# Altium PCB FROGSBORO.PcbDoc (part 1 of 3)
Units mm, origin at the board's own origin, x right, y up, seen from the top; angles counter-clockwise.
Board outline 36.5 x 67 mm, 6 copper layers (Top Layer, GND, SIGV, SIGH, Power, Bottom Layer), stack 1.197 mm thick; 116 components, 83 nets, 599 pads, 359 vias.
Unrouted connection lines stored in the file: 50.
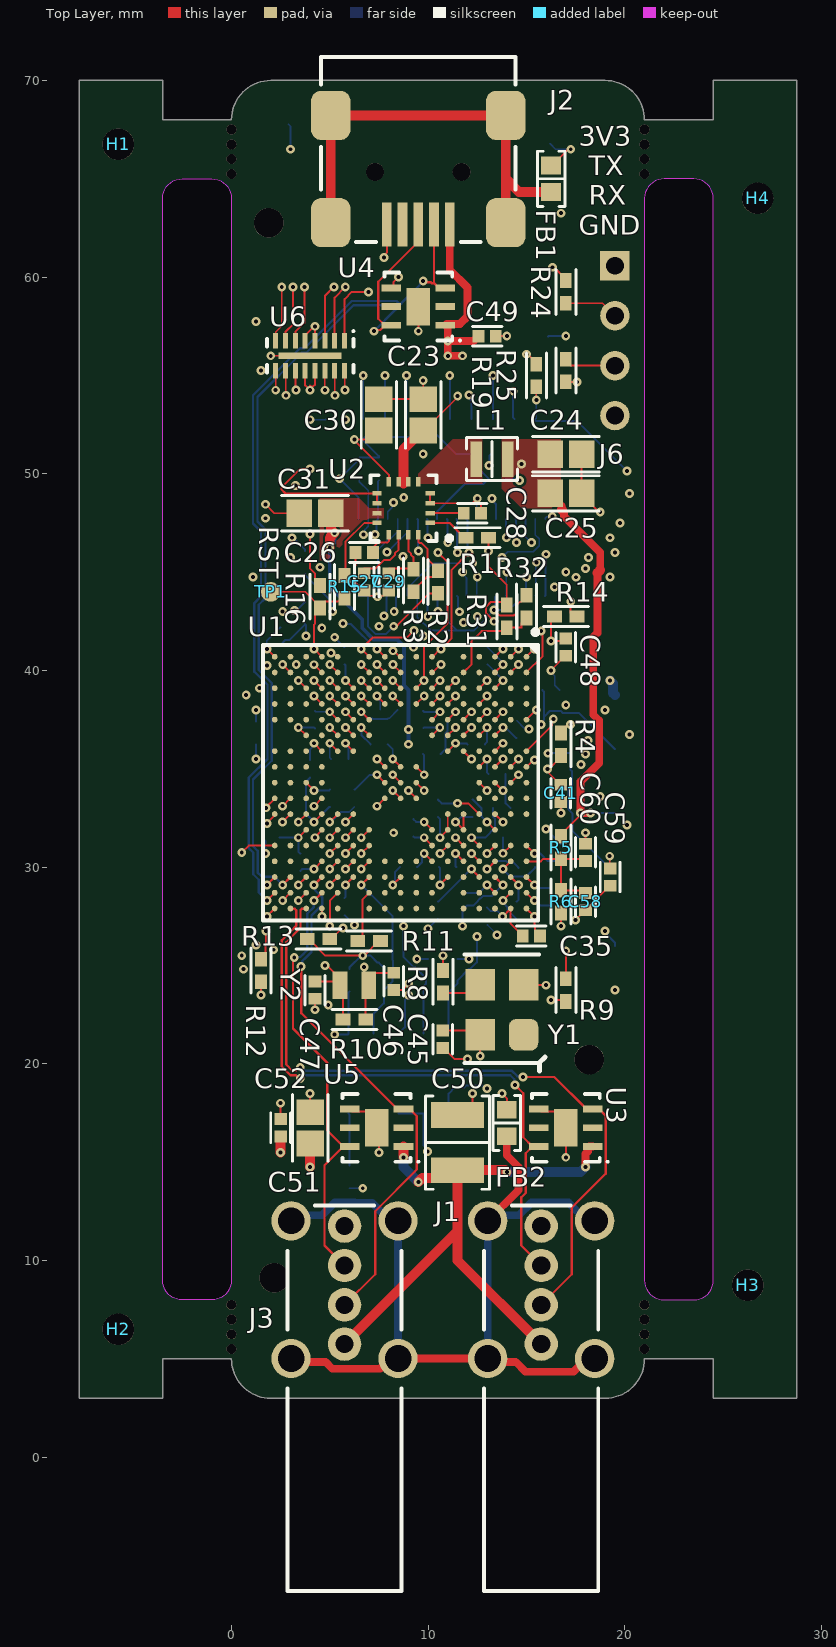
[diagram p0: Top Layer view]
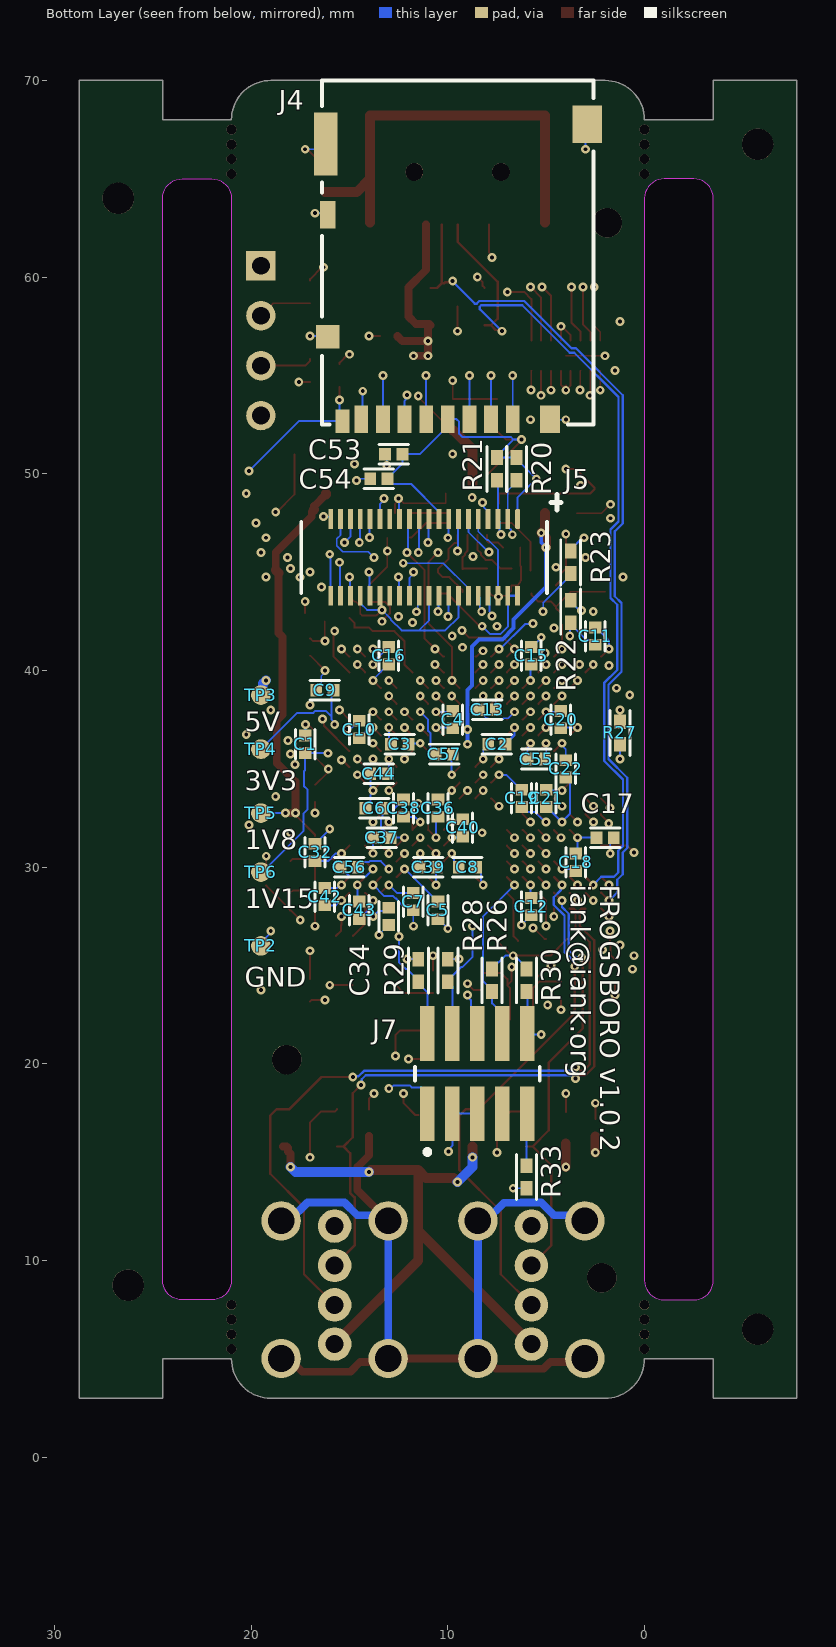
[diagram p1: Bottom Layer view, seen from below]
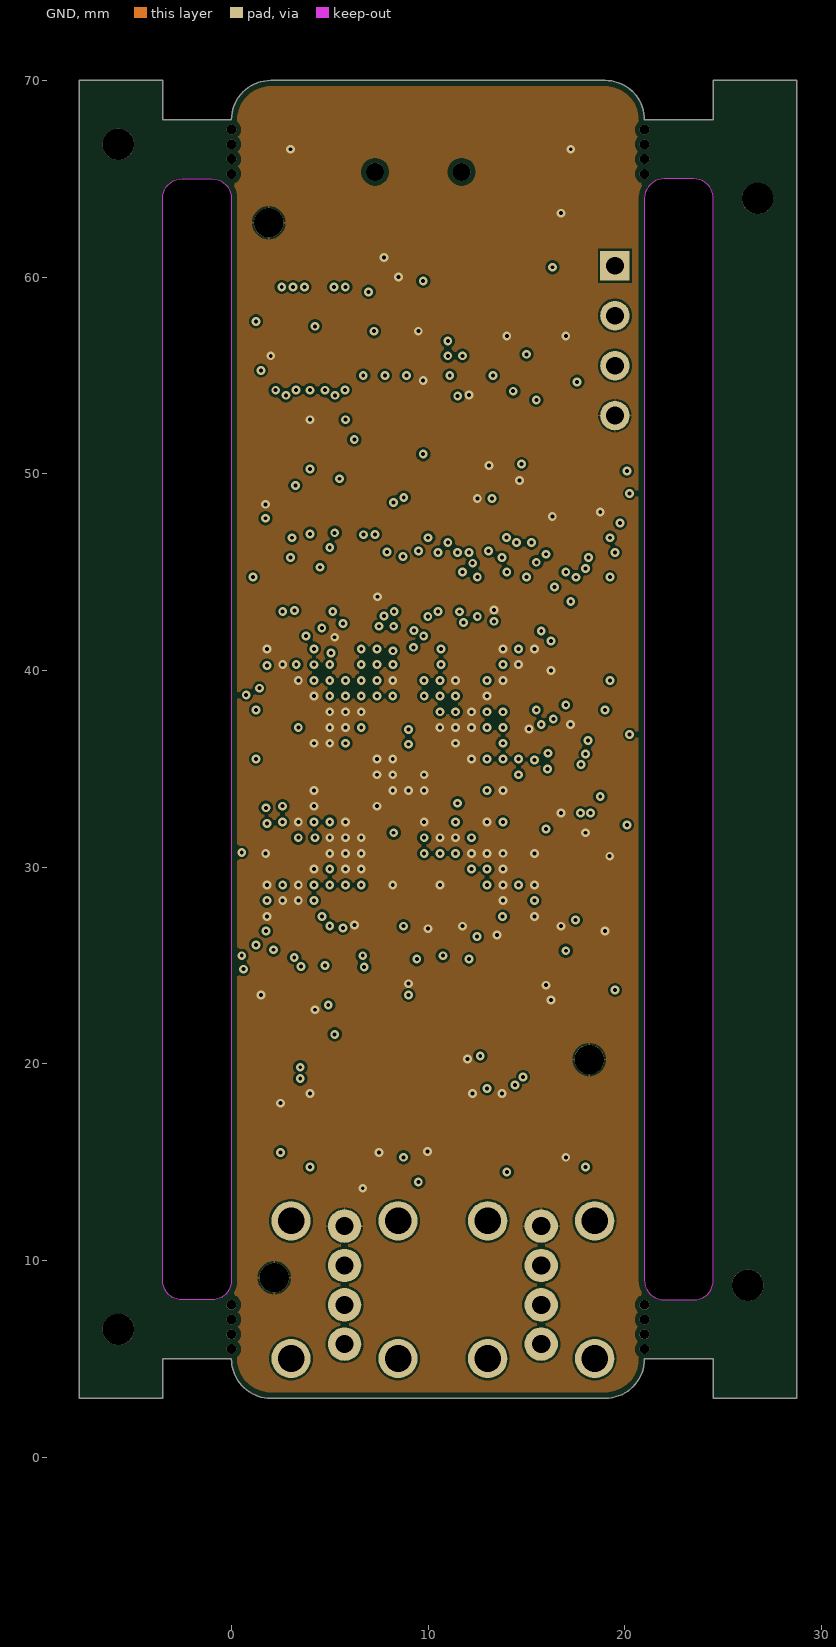
[diagram p2: GND]
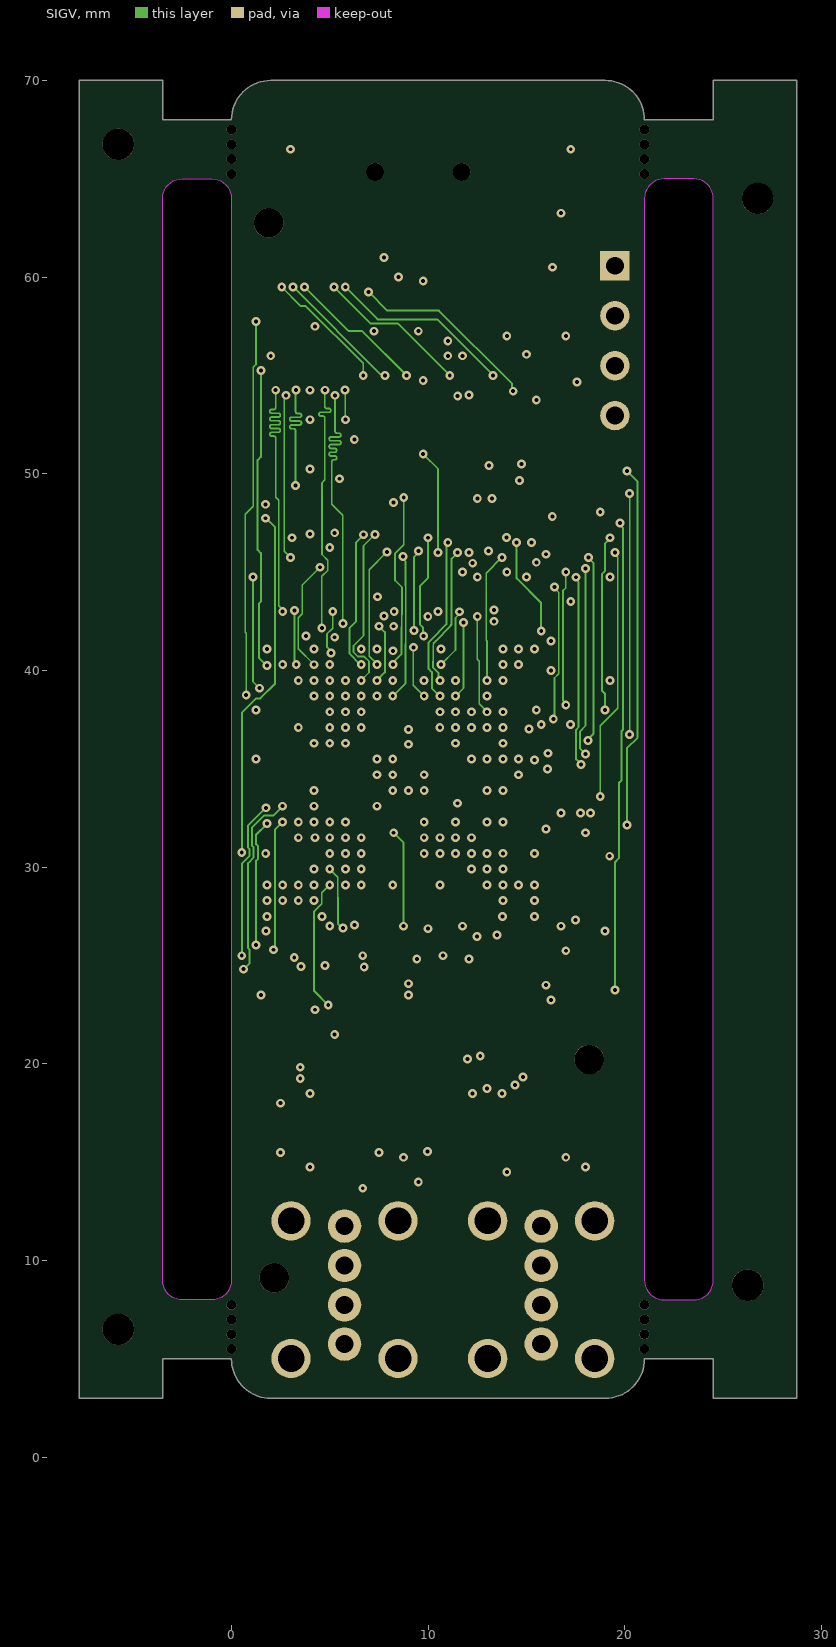
[diagram p3: SIGV]
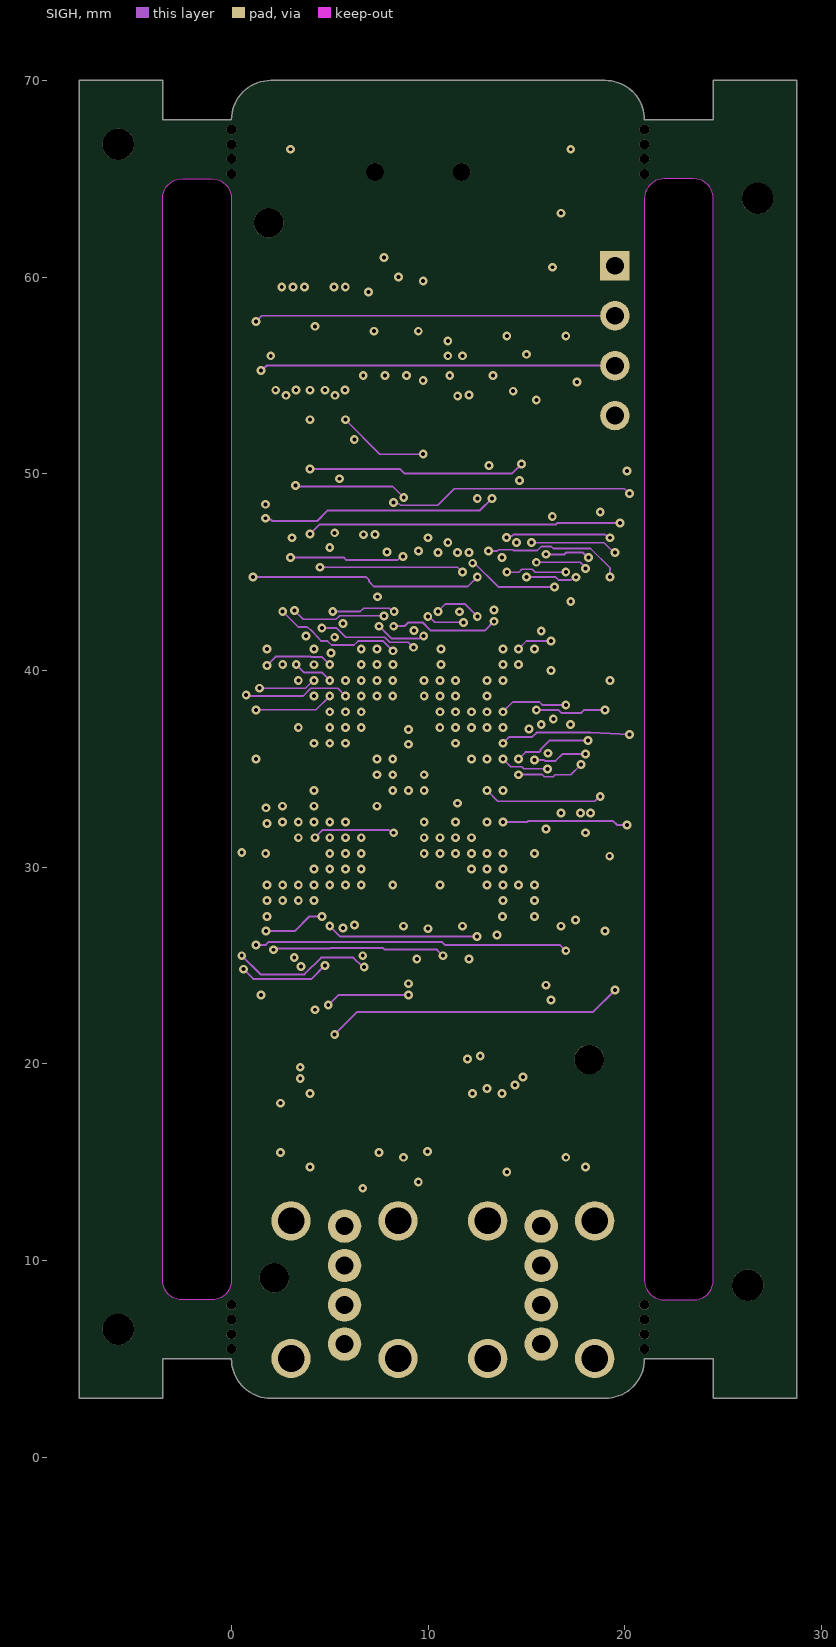
[diagram p4: SIGH]
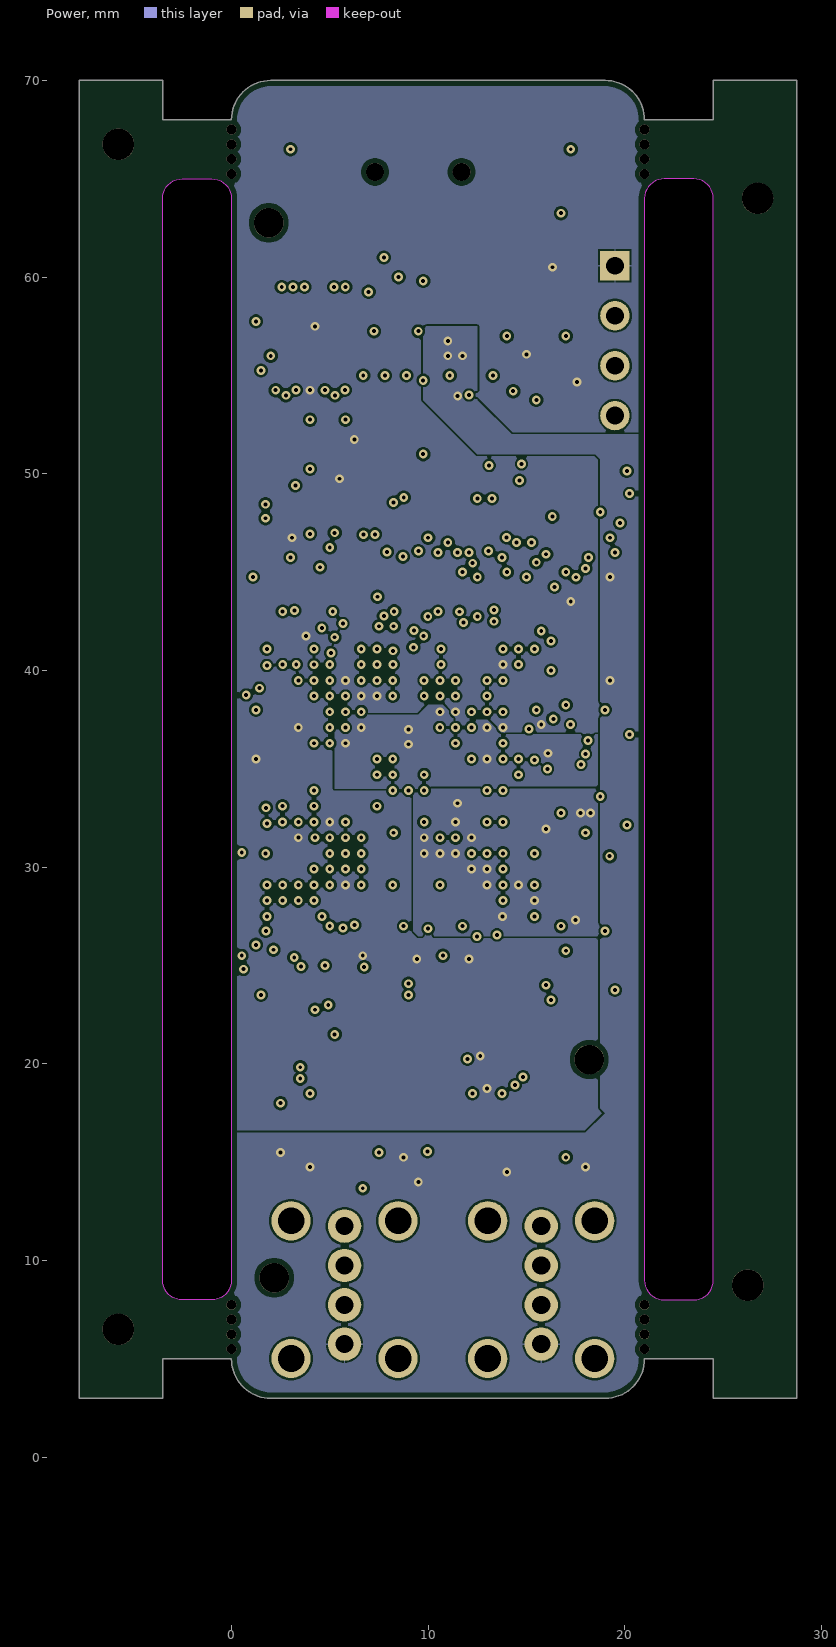
[diagram p5: Power]

## Layer stack, top to bottom
Top Solder: solder mask 0.0127, Solder Resist, Dk 3.8
Top Layer: signal copper 0.035
Dielectric 1: prepreg 0.1, 2313, Dk 4.05
GND: signal copper 0.0175
Core 1: core 0.365, FR-4, Dk 4.5
SIGV: signal copper 0.0175
Dielectric 2: prepreg 0.127, 2116, Dk 4.25
SIGH: signal copper 0.0175
Core 2: core 0.365, FR-4, Dk 4.5
Power: signal copper 0.0175
Dielectric 3: prepreg 0.1, 2313, Dk 4.05
Bottom Layer: signal copper 0.035
Bottom Solder: solder mask 0.0127, Solder Resist, Dk 3.8

## Board outline
-7.75,3 -3.5,3 -3.5,5 0,5 ccw(c2,5) 2,3 19,3 ccw(c19,5) 21,5 24.5,5 24.5,3 28.75,3 28.75,70 24.5,70 24.5,68 21,68 ccw(c19,68) 19,70 2,70 ccw(c2,68) 0,68 -3.5,68 -3.5,70 -7.75,70
cut-out: 21,9 ccw(c22,9) 22,8 23.5,8 ccw(c23.5,9) 24.5,9 24.5,64 ccw(c23.5,64) 23.5,65 22,65 ccw(c22,64) 21,64
cut-out: -3.5,9 -3.5,64 cw(c-2.5,64) -2.5,65 -1,65 cw(c-1,64) 0,64 0,9 cw(c-1,9) -1,8 -2.5,8 cw(c-2.5,9)

## Design rules (kind name [scope] priority, off if disabled: settings)
BoardOutlineClearance [All] p1: gap=0.3 ignorepadtopadclearanceinfootprint=FALSE
Clearance [All] p1: gap=0.105 ignorepadtopadclearanceinfootprint=FALSE except(0.089: Arc-Text Track-Text SMDPad-Text THPad-Text Fill-Text Poly-Text Region-Text Text-Text; 0.127: Arc-Via Track-Via SMDPad-Via THPad-Via Via-Via Via-Fill Via-Poly Via-Region Via-Text; 0.25: Arc-Hole Track-Hole SMDPad-Hole THPad-Hole Via-Hole Fill-Hole Poly-Hole Region-Hole Text-Hole)
ComponentClearance [All] p1: gap=0.089 collisioncheckmode=3 verticalgap=0.089 showdistances=TRUE
DiffPairsRouting DiffPairsRouting_USB [InDifferentialPairClass('DIFF90')] p1: maxlimit=0.254 minlimit=0.105 mostfreqgap=0.105 toplayer_minwidth=0.117 toplayer_maxwidth=0.381 toplayer_prefwidth=0.117 midlayer1_minwidth=0.117 midlayer1_maxwidth=0.381 midlayer1_prefwidth=0.117 midlayer2_minwidth=0.117 midlayer2_maxwidth=0.381 midlayer2_prefwidth=0.147 midlayer3_minwidth=0.117 midlayer3_maxwidth=0.381 midlayer3_prefwidth=0.117 midlayer4_minwidth=0.117 midlayer4_maxwidth=0.381 midlayer4_prefwidth=0.117 bottomlayer_minwidth=0.117 bottomlayer_maxwidth=0.381 bottomlayer_prefwidth=0.117 maxuncoupledlength=12.7
DiffPairsRouting [All] p2: maxlimit=0.089 minlimit=0.089 mostfreqgap=0.089 toplayer_minwidth=0.089 toplayer_maxwidth=1816.048 toplayer_prefwidth=0.089 midlayer1_minwidth=0.089 midlayer1_maxwidth=1816.048 midlayer1_prefwidth=0.089 midlayer2_minwidth=0.089 midlayer2_maxwidth=1816.048 midlayer2_prefwidth=0.089 midlayer3_minwidth=0.089 midlayer3_maxwidth=1816.048 midlayer3_prefwidth=0.089 midlayer4_minwidth=0.089 midlayer4_maxwidth=1816.048 midlayer4_prefwidth=0.089 bottomlayer_minwidth=0.089 bottomlayer_maxwidth=1816.048 bottomlayer_prefwidth=0.089 maxuncoupledlength=12.7
Height [All] p1: minheight=0 maxheight=1816.048 prefheight=12.7
HoleSize [All] p1: absolutevalues=TRUE maxlimit=6.3 minlimit=0.2 maxpercent=80.000 minpercent=20.000
HoleToHoleClearance [All] p1: gap=0.25 allowstackedmicrovias=FALSE
MatchedLengths MatchLengths_xSignals_U1_J4 [InxSignalClass('xSignals_U1_J4_MatchLengthsClass')] p1: tolerance=2.54 checknetsindiffpair=FALSE checkdiffpairvsdiffpair=TRUE checkxsignals=TRUE checkothers=TRUE
MatchedLengths MatchLengths_SDIO_U1_J4 [InxSignalClass('SDIO_U1_J4_MatchLengths')] p2: tolerance=2.54 checknetsindiffpair=FALSE checkdiffpairvsdiffpair=TRUE checkxsignals=TRUE checkothers=TRUE
MatchedLengths "Schematic Matched Net Lengths_10" [InNet('NetU1_J1')] p3: tolerance=0.25 checknetsindiffpair=FALSE checkdiffpairvsdiffpair=TRUE checkxsignals=TRUE checkothers=TRUE
MatchedLengths "Schematic Matched Net Lengths_9" [InNet('NetU1_J4')] p4: tolerance=0.25 checknetsindiffpair=FALSE checkdiffpairvsdiffpair=TRUE checkxsignals=TRUE checkothers=TRUE
MatchedLengths "Schematic Matched Net Lengths_8" [InNet('NetU1_K1')] p5: tolerance=0.25 checknetsindiffpair=FALSE checkdiffpairvsdiffpair=TRUE checkxsignals=TRUE checkothers=TRUE
MatchedLengths "Schematic Matched Net Lengths_7" [InNet('NetU1_H3')] p6: tolerance=0.25 checknetsindiffpair=FALSE checkdiffpairvsdiffpair=TRUE checkxsignals=TRUE checkothers=TRUE
MatchedLengths "Schematic Matched Net Lengths_6" [InNet('NetU1_H4')] p7: tolerance=0.25 checknetsindiffpair=FALSE checkdiffpairvsdiffpair=TRUE checkxsignals=TRUE checkothers=TRUE
MatchedLengths "Schematic Matched Net Lengths_5" [InNet('NetU1_J2')] p8: tolerance=0.25 checknetsindiffpair=FALSE checkdiffpairvsdiffpair=TRUE checkxsignals=TRUE checkothers=TRUE
MinimumAnnularRing [All] p1: minimumring=0.076
MinimumSolderMaskSliver [All] p1: minsoldermaskwidth=0
PlaneClearance [All] p1: clearance=0.089
PlaneConnect PlaneConnectPowerPads [InPadClass('PowerPads')] p1: planeconnectstyle=Direct reliefexpansion=0.508 reliefentries=4 reliefconductorwidth=0.254 reliefairgap=0.254
PlaneConnect [All] p2: pad.planeconnectstyle=Relief pad.reliefexpansion=0.3 pad.reliefentries=4 pad.reliefconductorwidth=0.089 pad.reliefairgap=0.089 via.planeconnectstyle=Direct via.reliefexpansion=0.3 via.reliefentries=4 via.reliefconductorwidth=0.127 via.reliefairgap=0.127
PolygonConnect PolygonConnectPowerPads [All vs (InPadClass('PowerPads'))] p1: connectstyle=Direct reliefconductorwidth=0.254 reliefentries=4 polygonreliefangle="90 Angle" airgapwidth=0.254
PolygonConnect [All] p2: thpad.connectstyle=Relief thpad.reliefconductorwidth=0.089 thpad.reliefentries=4 thpad.polygonreliefangle="90 Angle" thpad.airgapwidth=0.089 smdpad.connectstyle=Direct smdpad.reliefconductorwidth=0.089 smdpad.reliefentries=4 smdpad.polygonreliefangle="90 Angle" smdpad.airgapwidth=0.089 via.connectstyle=Direct via.reliefconductorwidth=0.127 via.reliefentries=4 via.polygonreliefangle="90 Angle" via.airgapwidth=0.127
RoutingVias [All] p1: holewidth=0.2 width=0.45 viastyle="Through Hole" minholewidth=0.2 minwidth=0.45 maxholewidth=6.3 maxwidth=6.55
SilkToSilkClearance [All] p1: silktosilkclearance=0
SilkToSolderMaskClearance [IsPad] p1: minsilkscreentomaskgap=0.089 clearancetoexposedcopper=TRUE
SolderMaskExpansion [All] p1: expansion=0.075 istentingtop=FALSE
Width [All] p1: maxlimit=16 minlimit=0.089 preferedwidth=0.102 midlayer1_prefwidth=0.089 midlayer3_prefwidth=0.089 midlayer4_prefwidth=0.089 minimp=50.000000 maximp=50.000000 favimp=50.000000
20 further rules are at their usual default settings.

## Classes and differential pairs
differential pair class DIFF90: USBA USBB USBC
differential pair USBC: +USBC_P -USBC_N
differential pair USBB: +USBB_P -USBB_N
differential pair USBA: +USBA_P -USBA_N

## Components (designator, comment, footprint, x,y, rotation, side; value= is the part's Value field where it differs from the comment)
C1 "4.7µF" "CAP 0402_1005" 17.25,36.25 r270 bottom
C2 "0.1µF" "CAP 0402_1005" 7.5,36.25 r0 bottom
C3 "0.1µF" "CAP 0402_1005" 12.44,36.25 r180 bottom
C4 "0.1µF" "CAP 0402_1005" 9.75,37.5 r270 bottom
C5 "4.7µF" "CAP 0402_1005" 10.5,27.81 r90 bottom
C6 "0.1µF" "CAP 0402_1005" 13.75,33 r0 bottom
C7 "0.1µF" "CAP 0402_1005" 11.75,28.25 r270 bottom
C8 "0.1µF" "CAP 0402_1005" 9,30 r180 bottom
C9 "4.7µF" "CAP 0402_1005" 16.25,39 r180 bottom
C10 "0.1µF" "CAP 0402_1005" 14.5,37 r90 bottom
C11 "4.7µF" "CAP 0402_1005" 2.5,41.75 r270 bottom
C12 "0.1µF" "CAP 0402_1005" 5.75,28 r270 bottom
C13 "0.1µF" "CAP 0402_1005" 8,38 r0 bottom
C15 "0.1µF" "CAP 0402_1005" 5.75,40.75 r90 bottom
C16 "0.1µF" "CAP 0402_1005" 13,40.75 r270 bottom
C17 "4.7µF" "CAP 0402_1005" 2,31.5 r0 bottom
C18 "0.1µF" "CAP 0402_1005" 3.5,30.25 r270 bottom
C19 "0.1µF" "CAP 0402_1005" 6.25,33.5 r90 bottom
C20 "0.1µF" "CAP 0402_1005" 4.25,37.5 r90 bottom
C21 "0.1µF" "CAP 0402_1005" 5,33.5 r90 bottom
C22 "2.2µF" "CAP 0402_1005" 4,35 r90 bottom
C23 "10µF" "CAP 0805_2012" 9.75,53 r270 top
C24 "10µF" "CAP 0805_2012" 17,51 r180 top
C25 "10µF" "CAP 0805_2012" 17,49 r180 top
C26 "10nF" "CAP 0402_1005" 6.75,46 r0 top
C27 "0.1µF" "CAP 0402_1005" 6.75,44.5 r90 top
C28 "0.1µF" "CAP 0402_1005" 12.25,48 r180 top
C29 "0.1µF" "CAP 0402_1005" 8,44.5 r90 top
C30 "10µF" "CAP 0805_2012" 7.5,53 r270 top
C31 "10µF" "CAP 0805_2012" 4.25,48 r0 top
C32 "4.7µF" "CAP 0402_1005" 16.75,30.75 r90 bottom
C34 "0.1µF" "CAP 0402_1005" 13,27.5 r270 bottom
C35 "0.1µF" "CAP 0402_1005" 15.25,26.5 r0 top
C36 "0.1µF" "CAP 0402_1005" 10.5,33 r270 bottom
C37 "0.1µF" "CAP 0402_1005" 13.36,31.5 r0 bottom
C38 "0.1µF" "CAP 0402_1005" 12.25,33 r90 bottom
C39 "0.1µF" "CAP 0402_1005" 11,30 r180 bottom
C40 "0.1µF" "CAP 0402_1005" 9.25,32 r90 bottom
C41 "22pF" "CAP 0402_1005" 16.75,33.75 r90 top
C42 "0.1µF" "CAP 0402_1005" 16.25,28.5 r90 bottom
C43 "0.1µF" "CAP 0402_1005" 14.5,27.81 r270 bottom
C44 "0.1µF" "CAP 0402_1005" 13.5,34.75 r0 bottom
C45 "0.1µF" "CAP 0402_1005" 10.75,21.25 r270 top
C46 "20pF" "CAP 0402_1005" 8.25,24.19 r90 top
C47 "20pF" "CAP 0402_1005" 4.25,23.75 r90 top
C48 "1µF" "CAP 0402_1005" 17,41.19 r90 top
C49 "20pF" "CAP 0402_1005" 13,57 r180 top
C50 "100µF" "CAP 1210_3225 - 2.8MM" 11.5,16 r270 top
C51 "10µF" "CAP 0805_2012" 4,16.75 r270 top
C52 "0.1µF" "CAP 0402_1005" 2.5,16.75 r90 top
C53 "0.1µF" "CAP 0402_1005" 12.75,51 r0 bottom
C54 "4.7µF" "CAP 0402_1005" 13.5,49.75 r180 bottom
C55 "0.1µF" "CAP 0402_1005" 5.5,35.5 r180 bottom
C56 "0.1µF" "CAP 0402_1005" 15,30 r0 bottom
C57 "0.1µF" "CAP 0402_1005" 10.19,35.75 r180 bottom
C58 "0.1µF" "CAP 0402_1005" 18,28.25 r90 top
C59 "4.7µF" "CAP 0402_1005" 19.25,29.5 r270 top
C60 "0.1µF" "CAP 0402_1005" 18,30.75 r90 top
FB1 "180R" "FER 0603_1608" 16.25,65 r270 top
FB2 "180R" "FER 0603_1608" 14,17 r270 top
H1 "Stencil_Alignment" Stencil_Alignment -5.75,66.75 r0 top
H2 "Stencil_Alignment" Stencil_Alignment -5.75,6.5 r0 top
H3 "Stencil_Alignment" Stencil_Alignment 26.25,8.75 r0 top
H4 "Stencil_Alignment" Stencil_Alignment 26.75,64 r0 top
J1 "73725-0110BLF" "AMPHENOL USB 73725-0110BLF" 15.75,3 r0 top
J2 "10033526-N3212LF" "FCI USB 10033526-N3212LF" 9.5,66.5 r0 top
J3 "73725-0110BLF" "AMPHENOL USB 73725-0110BLF" 5.75,3 r0 top
J4 "DM3BT-DSF-PEJS" "HIROSE DM3BT-DSF-PEJS" 9.5,60.5 r0 bottom
J5 "DF23C-40DP-0.5V(92)" DF23C-40DP-0.5V(92) 11.25,45.75 r270 bottom
J6 "Header 4" HDR1X4 19.5,60.58 r270 top
J7 "FTSH-105-01-L-DV-K" SMTC-FTSH-105-01-L-DV-K_V 8.5,19.5 r180 bottom
L1 "2.2µH" "IND 0806_2016" 13.25,50.75 r0 top
R1 "100k" "RES 0402_1005" 12.5,46.75 r0 top
R2 "100k" "RES 0402_1005" 10.5,44.5 r270 top
R3 "22k" "RES 0402_1005" 9.25,44.575 r270 top
R4 "20k 1%" "RES 0402_1005" 16.75,36.25 r270 top
R5 "4.7k 1%" "RES 0402_1005" 16.75,31 r90 top
R6 "4.7k 1%" "RES 0402_1005" 16.75,28.25 r90 top
R8 "51R" "RES 0402_1005" 10.75,24.175 r90 top
R9 "0R" "RES 0402_1005" 17,23.75 r90 top
R10 "1M" "RES 0402_1005" 6.25,22.25 r0 top
R11 "100k" "RES 0402_1005" 7,26.25 r0 top
R12 "5.62k 1%" "RES 0402_1005" 1.5,24.75 r270 top
R13 "0R" "RES 0402_1005" 4.428,26.351 r0 top
R14 "51R" "RES 0402_1005" 17,42.75 r0 top
R15 "51R" "RES 0402_1005" 5.75,44.25 r270 top
R16 "51R" "RES 0402_1005" 4.5,43.75 r270 top
R19 "100k" "RES 0402_1005" 15.5,55 r90 top
R20 "2.2k" "RES 0402_1005" 6.5,50.25 r90 bottom
R21 "2.2k" "RES 0402_1005" 7.5,50.25 r90 bottom
R22 "100k" "RES 0402_1005" 3.75,43 r270 bottom
R23 "100k" "RES 0402_1005" 3.75,45.5 r90 bottom
R24 "100k" "RES 0402_1005" 17,59.25 r90 top
R25 "100k" "RES 0402_1005" 17,55.25 r270 top
R26 "100k" "RES 0402_1005" 7.75,24.25 r90 bottom
R27 "100k" "RES 0402_1005" 1.25,36.825 r270 bottom
R28 "100k" "RES 0402_1005" 10,24.75 r90 bottom
R29 "100k" "RES 0402_1005" 11.5,24.75 r90 bottom
R30 "100k" "RES 0402_1005" 6,24.25 r90 bottom
R31 "15k" "RES 0402_1005" 14,42.75 r270 top
R32 "22k" "RES 0402_1005" 15,43.25 r270 top
R33 "0R" "RES 0402_1005" 6,14.25 r270 bottom
TP1 "Testpoint" Testpoint 2,44 r0 top
TP2 "Testpoint" Testpoint 19.5,26 r180 bottom
TP3 "Testpoint" Testpoint 19.5,38.75 r180 bottom
TP4 "Testpoint" Testpoint 19.5,36 r180 bottom
TP5 "Testpoint" Testpoint 19.5,32.75 r180 bottom
TP6 "Testpoint" Testpoint 19.5,29.75 r180 bottom
U1 "SAM9X60D1G-I/4FB" BGA233C80P17X17_1400X1400X120 8.6,34.3 r270 top
U2 "MIC2800-G8SYML" QFN50P300X300X90-16N 8.75,48.25 r180 top
U3 "TPD2E001DRSR" SON95P300X80_HS-7N 17,16.75 r180 top
U4 "TPD2E001DRSR" SON95P300X80_HS-7N 9.5,58.5 r180 top
U5 "TPD2E001DRSR" SON95P300X80_HS-7N 7.38,16.75 r180 top
U6 "ECLAMP2410PQTCT" SON50P160X65_HS-17N 4,56 r270 top
Y1 "DSC1001BI5-024.0000T" DSC1001BI5 13.75,22.75 r180 top
Y2 "ABS06-32.768KHZ-T" ABRA-ABS06-2_V 6.25,24 r0 top

## Footprints (in the part's own frame and the unit in brackets; to place one, negate y for a bottom-side part, rotate by r counter-clockwise, add the part's x,y. Pads: shape width x height; smd on the part's side, far side on the other; paste and mask are expansions set on the pad)
ABRA-ABS06-2_V [mm] "SMD, 2-Leads, Body 2x1.2mm"
  rect 0.75x1.4 smd: 1(-0.725,0) 2(0.725,0)
  body extent -1,-0.6 1,0.6, height 0.6
"AMPHENOL USB 73725-0110BLF" [mm] "USB2.0 TYPEA 4 Pin Pitch 2mm"
  round 1.7 hole 0.92: 1(0,2.75) 2(0,4.75) 3(0,6.75) 4(0,8.75)
  round 2 hole 1.35: S(-2.72,2.02) S(-2.72,9.02) S(2.72,2.02) S(2.72,9.02)
  silkscreen extent -2.9,-9.8 2.9,9.8, body extent -3.56,-9.85 3.56,9.85, height 14.53
BGA233C80P17X17_1400X1400X120 [mm] "BGA, 233-Leads, Body 14.00x14.00mmx1.20mm, Pitch 0.80mm"
  round 0.29 smd: A1(-6.4,6.4) A2(-5.6,6.4) A3(-4.8,6.4) A4(-4,6.4) A5(-3.2,6.4) A7(-1.6,6.4) A8(-0.8,6.4) A9(0,6.4) A10(0.8,6.4) A11(1.6,6.4) A13(3.2,6.4) A14(4,6.4) A15(4.8,6.4) A16(5.6,6.4) A17(6.4,6.4) B1(-6.4,5.6) B2(-5.6,5.6) B3(-4.8,5.6) B4(-4,5.6) B5(-3.2,5.6) B7(-1.6,5.6) B8(-0.8,5.6) B9(0,5.6) B10(0.8,5.6) B11(1.6,5.6) B13(3.2,5.6) B14(4,5.6) B15(4.8,5.6) B16(5.6,5.6) B17(6.4,5.6) C1(-6.4,4.8) C2(-5.6,4.8) C3(-4.8,4.8) C4(-4,4.8) C5(-3.2,4.8) C6(-2.4,4.8) C7(-1.6,4.8) C8(-0.8,4.8) C9(0,4.8) C10(0.8,4.8) C11(1.6,4.8) C12(2.4,4.8) C13(3.2,4.8) C14(4,4.8) C15(4.8,4.8) C16(5.6,4.8) C17(6.4,4.8) D1(-6.4,4) D2(-5.6,4) D3(-4.8,4) D4(-4,4) D5(-3.2,4) D6(-2.4,4) D7(-1.6,4) D8(-0.8,4) D9(0,4) D10(0.8,4) D11(1.6,4) D12(2.4,4) D13(3.2,4) D14(4,4) D15(4.8,4) D16(5.6,4) D17(6.4,4) E1(-6.4,3.2) E2(-5.6,3.2) E3(-4.8,3.2) E4(-4,3.2) E5(-3.2,3.2) E6(-2.4,3.2) E7(-1.6,3.2) E11(1.6,3.2) E12(2.4,3.2) E13(3.2,3.2) E14(4,3.2) E15(4.8,3.2) E16(5.6,3.2) E17(6.4,3.2) F3(-4.8,2.4) F4(-4,2.4) F5(-3.2,2.4) F6(-2.4,2.4) F7(-1.6,2.4) F11(1.6,2.4) F12(2.4,2.4) F13(3.2,2.4) F14(4,2.4) F15(4.8,2.4) G1(-6.4,1.6) G2(-5.6,1.6) G3(-4.8,1.6) G4(-4,1.6) G5(-3.2,1.6) G6(-2.4,1.6) G12(2.4,1.6) G13(3.2,1.6) G14(4,1.6) G15(4.8,1.6) G16(5.6,1.6) G17(6.4,1.6) H1(-6.4,0.8) H2(-5.6,0.8) H3(-4.8,0.8) H4(-4,0.8) H8(-0.8,0.8) H9(0,0.8) H10(0.8,0.8) H14(4,0.8) H15(4.8,0.8) H16(5.6,0.8) H17(6.4,0.8) J1(-6.4,0) J2(-5.6,0) J3(-4.8,0) J4(-4,0) J8(-0.8,0) J9(0,0) J10(0.8,0) J14(4,0) J15(4.8,0) J16(5.6,0) J17(6.4,0) K1(-6.4,-0.8) K2(-5.6,-0.8) K3(-4.8,-0.8) K4(-4,-0.8) K8(-0.8,-0.8) K9(0,-0.8) K10(0.8,-0.8) K14(4,-0.8) K15(4.8,-0.8) K16(5.6,-0.8) K17(6.4,-0.8) L1(-6.4,-1.6) L2(-5.6,-1.6) L3(-4.8,-1.6) L4(-4,-1.6) L5(-3.2,-1.6) L6(-2.4,-1.6) L12(2.4,-1.6) L13(3.2,-1.6) L14(4,-1.6) L15(4.8,-1.6) L16(5.6,-1.6) L17(6.4,-1.6) M3(-4.8,-2.4) M4(-4,-2.4) M5(-3.2,-2.4) M6(-2.4,-2.4) M7(-1.6,-2.4) M11(1.6,-2.4) M12(2.4,-2.4) M13(3.2,-2.4) M14(4,-2.4) M15(4.8,-2.4) N1(-6.4,-3.2) N2(-5.6,-3.2) N3(-4.8,-3.2) N4(-4,-3.2) N5(-3.2,-3.2) N6(-2.4,-3.2) N7(-1.6,-3.2) N11(1.6,-3.2) N12(2.4,-3.2) N13(3.2,-3.2) N14(4,-3.2) N15(4.8,-3.2) N16(5.6,-3.2) N17(6.4,-3.2) P1(-6.4,-4) P2(-5.6,-4) P3(-4.8,-4) P4(-4,-4) P5(-3.2,-4) P6(-2.4,-4) P7(-1.6,-4) P8(-0.8,-4) P9(0,-4) P10(0.8,-4) P11(1.6,-4) P12(2.4,-4) P13(3.2,-4) P14(4,-4) P15(4.8,-4) P16(5.6,-4) P17(6.4,-4) R1(-6.4,-4.8) R2(-5.6,-4.8) R3(-4.8,-4.8) R4(-4,-4.8) R5(-3.2,-4.8) R6(-2.4,-4.8) R7(-1.6,-4.8) R8(-0.8,-4.8) R9(0,-4.8) R10(0.8,-4.8) R11(1.6,-4.8) R12(2.4,-4.8) R13(3.2,-4.8) R14(4,-4.8) R15(4.8,-4.8) R16(5.6,-4.8) R17(6.4,-4.8) T1(-6.4,-5.6) T2(-5.6,-5.6) T3(-4.8,-5.6) T4(-4,-5.6) T5(-3.2,-5.6) T7(-1.6,-5.6) T8(-0.8,-5.6) T9(0,-5.6) T10(0.8,-5.6) T11(1.6,-5.6) T13(3.2,-5.6) T14(4,-5.6) T15(4.8,-5.6) T16(5.6,-5.6) T17(6.4,-5.6) U1(-6.4,-6.4) U2(-5.6,-6.4) U3(-4.8,-6.4) U4(-4,-6.4) U5(-3.2,-6.4) U7(-1.6,-6.4) U8(-0.8,-6.4) U9(0,-6.4) U10(0.8,-6.4) U11(1.6,-6.4) U13(3.2,-6.4) U14(4,-6.4) U15(4.8,-6.4) U16(5.6,-6.4) U17(6.4,-6.4)
  silkscreen extent -7.77,-7 7,7, body extent -7,-7 7,7, height 1.2
"CAP 0402_1005" [mm] "Chip Capacitor, 2-Leads, Body 1.02x0.51mm, IPC Medium Density"
  rect 0.6x0.64 smd: 1(-0.44,0) 2(0.44,0)
  silkscreen extent -0.75,-0.5 0.75,0.5, body extent -0.5,-0.26 0.5,0.26, height 0.52
"CAP 0805_2012" [mm] "Chip Capacitor, 2-Leads, Body 2.00x1.20mm, IPC Medium Density"
  rect 1.3x1.4 smd: 1(-0.8,0) 2(0.8,0)
  silkscreen extent -1.7,-0.9 1.7,0.9, body extent -1,-0.64 1,0.64, height 1.26
"CAP 1210_3225 - 2.8MM" [mm] "Chip Capacitor, 2-Leads, Body 3.20x2.50mm, IPC Medium Density"
  rect 1.3x2.7 smd: 1(-1.4,0) 2(1.4,0)
  silkscreen extent -2.37,-1.63 2.37,1.63, body extent -1.6,-1.25 1.6,1.25, height 2.8
DF23C-40DP-0.5V(92) [mm]
  rrect50% 1x0.25 smd: 1(-1.95,4.8)
  rect 1x0.25 smd: 2(1.95,4.8) 3(-1.95,4.3) 4(1.95,4.3) 5(-1.95,3.8) 6(1.95,3.8) 7(-1.95,3.3) 8(1.95,3.3) 9(-1.95,2.8) 10(1.95,2.8) 11(-1.95,2.3) 12(1.95,2.3) 13(-1.95,1.8) 14(1.95,1.8) 15(-1.95,1.3) 16(1.95,1.3) 17(-1.95,0.8) 18(1.95,0.8) 19(-1.95,0.3) 20(1.95,0.3) 21(-1.95,-0.2) 22(1.95,-0.2) 23(-1.95,-0.7) 24(1.95,-0.7) 25(-1.95,-1.2) 26(1.95,-1.2) 27(-1.95,-1.7) 28(1.95,-1.7) 29(-1.95,-2.2) 30(1.95,-2.2) 31(-1.95,-2.7) 32(1.95,-2.7) 33(-1.95,-3.2) 34(1.95,-3.2) 35(-1.95,-3.7) 36(1.95,-3.7) 37(-1.95,-4.2) 38(1.95,-4.2) 39(-1.95,-4.7) 40(1.95,-4.7)
  silkscreen extent -3.2,-6.2 1.8,7, body extent -2.18,-5.7 2.12,5.8, height 1.2
DSC1001BI5 [mm]
  rrect50% 1.5x1.6 smd: 1(-1.1,1.27)
  rect 1.5x1.6 smd: 2(-1.1,-1.27) 3(1.1,-1.27) 4(1.1,1.27)
  silkscreen extent -2.2,-2.8 1.9,3.1, body extent -1.6,-2.55 1.6,2.45, height 0.85
"FCI USB 10033526-N3212LF" [mm] "USB 2.0 Type B Mini"
  rect 0.5x2.25 smd: 1(1.6,-3.826) 2(0.8,-3.826) 3(0,-3.826) 4(-0.8,-3.826) 5(-1.6,-3.826)
  round 0.9 hole 0.9 unplated: M(-2.2,-1.151) M(2.2,-1.151)
  rrect50% 2x2.5 smd: S(-4.45,-3.731) S(-4.45,1.719) S(4.45,-3.731) S(4.45,1.719)
  silkscreen extent -4.95,-4.71 4.95,4.69, body extent -4.95,-4.7 4.95,4.7, height 4.01
"FER 0603_1608" [mm] "Chip Ferrite, 2-Leads, Body 1.60x0.80mm, IPC Medium Density"
  rect 0.9x1 smd: 1(-0.675,0) 2(0.675,0)
  silkscreen extent -1.4,-0.7 1.4,0.7, body extent -0.8,-0.41 0.8,0.41, height 0.82
HDR1X4 [mm] "Connector; Header; 4 Position"
  rect 1.5x1.5 hole 0.9: 1(0,0)
  round 1.5 hole 0.9: 2(2.54,0) 3(5.08,0) 4(7.62,0)
"HIROSE DM3BT-DSF-PEJS" [mm]
  rect 0.7x1.4 smd: 1(-2.8,7.725) 2(-1.7,7.725) 3(-0.6,7.725) 4(0.5,7.725) 5(1.6,7.725) 6(2.7,7.725) 7(3.8,7.725) 8(4.9,7.725)
  rect 0.7x1.2 smd: 9(5.85,7.825)
  rect 0.8x1.4 smd: 10(6.6,-2.675)
  rect 1.5x1.9 smd: S(-6.6,-7.275)
  rect 1x1.4 smd: S(-4.7,7.725)
  rect 1.2x1.2 smd: S(6.6,3.525)
  rect 1.2x3.2 smd: S(6.7,-6.275)
  silkscreen extent -6.9,-9.5 6.9,8, body extent -6.92,-9.55 6.93,8, height 1.83
"IND 0806_2016" [mm] "Chip Capacitor, 2-Leads, Body 2.00x1.20mm, IPC Medium Density"
  rect 0.6x1.8 smd: 1(-0.8,0) 2(0.8,0)
  silkscreen extent -1.3,-1.1 1.3,1.1, body extent -1.01,-0.91 1.01,0.91, height 1.81
QFN50P300X300X90-16N [mm] "QFN, 16-Leads, Body 3.00x3.00mm, Pitch 0.50mm, IPC Medium Density"
  rect 0.48x0.23 smd: 1(-1.35,0.75) 2(-1.35,0.25) 3(-1.35,-0.25) 4(-1.35,-0.75) 9(1.35,-0.75) 10(1.35,-0.25) 11(1.35,0.25) 12(1.35,0.75)
  rect 0.23x0.48 smd: 5(-0.75,-1.35) 6(-0.25,-1.35) 7(0.25,-1.35) 8(0.75,-1.35) 13(0.75,1.35) 14(0.25,1.35) 15(-0.25,1.35) 16(-0.75,1.35)
  silkscreen extent -2.45,-1.68 1.68,1.68, body extent -1.58,-1.58 1.58,1.58, height 0.9
"RES 0402_1005" [mm] "Chip Resistor, 2-Leads, Body 1.0x0.5mm, IPC Medium Density"
  rect 0.75x0.6 smd: 1(-0.575,0) 2(0.575,0)
  silkscreen extent -1.14,-0.51 1.14,0.51, body extent -0.5,-0.25 0.5,0.25, height 0.35
SMTC-FTSH-105-01-L-DV-K_V [mm] "CONN, 10-Leads, Body 6.35x3.43mm, Pitch 1.27mm"
  rect 0.74x2.79 smd: 1(-2.54,-2.035) 2(-2.54,2.035) 3(-1.27,-2.035) 4(-1.27,2.035) 5(0,-2.035) 6(0,2.035) 7(1.27,-2.035) 8(1.27,2.035) 9(2.54,-2.035) 10(2.54,2.035)
  silkscreen extent -3.17,-4.1 3.17,0.34, body extent -3.17,-2.92 3.18,2.92, height 6.12
SON50P160X65_HS-17N [mm] "SON, 16-Leads, Body 4.00x1.60mm, Pitch 0.50mm, Thermal Pad 3.20x0.33mm, IPC Medium Density"
  rect 0.8x0.25 smd: 1(-0.765,1.75) 2(-0.765,1.25) 3(-0.765,0.75) 4(-0.765,0.25) 5(-0.765,-0.25) 6(-0.765,-0.75) 7(-0.765,-1.25) 8(-0.765,-1.75) 9(0.765,-1.75) 10(0.765,-1.25) 11(0.765,-0.75) 12(0.765,-0.25) 13(0.765,0.25) 14(0.765,0.75) 15(0.765,1.25) 16(0.765,1.75)
  rect 0.33x3.2 smd: 17(0,0)
  silkscreen extent -1.3,-2.2 0.85,2.25, body extent -0.85,-2.05 0.85,2.05, height 0.65
SON95P300X80_HS-7N [mm] "SON, 6-Leads, Body 3.00x3.00mm, Pitch 0.95mm, Thermal Pad 1.90x1.20mm, IPC Medium Density"
  rect 1x0.35 smd: 1(-1.37,0.95) 2(-1.37,0) 3(-1.37,-0.95) 4(1.37,-0.95) 5(1.37,0) 6(1.37,0.95)
  rect 1.2x1.9 smd: 7(0,0)
  silkscreen extent -2.17,-1.73 1.73,1.77, body extent -1.63,-1.58 1.63,1.58, height 0.8
Stencil_Alignment [mm]
  round 1.6 hole 1.6 paste+1.6 mask+0: 1(0,0)
Testpoint [mm]
  round 1 smd: 0(0,0)

## Part data
C1 C5 C9 C11 C17 C32 C54 C59: library part CL05A475KP5NRNC, "CAP CER 4.7UF 10V X5R 0402", Device Package="0402 (1005 Metric)", Manufacturer="Samsung Electro-Mechanics", Operating Temperature="-55°C ~ 85°C", Supplier Part Number 1=1276-1480-1-ND, Temperature Coefficient=X5R, Tolerance=±10%, Voltage - Rated=10V, Applications="General Purpose", Capacitance=4.7µF, ComponentLink1Description=Datasheet, ComponentLink1URL=http://www.samsungsem.com/kr/support/product-search/mlcc/CL05A475KP5NRNC.jsp, ComponentLink2Description="DigiKey Link", ComponentLink2URL=http://digikey.com/product-detail/en/samsung-electro-mechanics/CL05A475KP5NRNC/1276-1480-1-ND/3889566, LastUpdated="9/2/2020 1:02:23 AM", Lifecycle Status=Active, Minimum Order=1, Mounting Type="Surface Mount, MLCC", Package / Case="0402 (1005 Metric)", Packaging=TapeAndReel, Part Number=CL05A475KP5NRNC, Part Status=Active, PartId=2191, Price=0.08, Series=CL, Size / Dimension="0.039\" L x 0.020\" W (1.00mm x 0.50mm)", Supplier 1=DigiKey, Thickness (Max)="0.022\" (0.55mm)"
C2 C3 C4 C6 C7 C8 C10 C12 C13 C15 C16 C18 C19 C20 C21 C27 C28 C29 C34 C35 C36 C37 C38 C39 C40 C42 C43 C44 C45 C52 C53 C55 C56 C57 C58 C60: library part C0402C104K4PACTU, "CAP CER 0.1UF 16V X5R 0402", Device Package="0402 (1005 Metric)", Manufacturer=KEMET, Operating Temperature="-55°C ~ 85°C", Supplier Part Number 1=399-7762-1-ND, Temperature Coefficient=X5R, Tolerance=±10%, Voltage - Rated=16V, Applications="General Purpose", Capacitance=0.1µF, ComponentLink1Description=Datasheet, ComponentLink1URL=https://api.kemet.com/component-edge/download/datasheet/C0402C104K4PACTU.pdf, ComponentLink2Description="DigiKey Link", ComponentLink2URL=http://digikey.com/product-detail/en/kemet/C0402C104K4PACTU/399-7762-1-ND/3471485, LastUpdated="9/2/2020 1:02:03 AM", Lifecycle Status=Active, Minimum Order=1, Mounting Type="Surface Mount, MLCC", Package / Case="0402 (1005 Metric)", Packaging=TapeAndReel, Part Number=C0402C104K4PACTU, Part Status=Active, PartId=11334, Price=0.01, Series="SMD Comm X5R", Size / Dimension="0.039\" L x 0.020\" W (1.00mm x 0.50mm)", Supplier 1=DigiKey, Thickness (Max)="0.022\" (0.55mm)"
C22: library part C1005X5R1A225K050BC, "CAP CER 2.2UF 10V X5R 0402", Device Package="0402 (1005 Metric)", Manufacturer="TDK Corporation", Operating Temperature="-55°C ~ 85°C", Supplier Part Number 1=445-7392-1-ND, Temperature Coefficient=X5R, Tolerance=±10%, Voltage - Rated=10V, Applications="General Purpose", Capacitance=2.2µF, ComponentLink1Description=Datasheet, ComponentLink1URL=https://product.tdk.com/info/en/catalog/datasheets/mlcc_commercial_general_en.pdf?ref_disty=digikey, ComponentLink2Description="DigiKey Link", ComponentLink2URL=http://digikey.com/product-detail/en/tdk-corporation/C1005X5R1A225K050BC/445-7392-1-ND/2733464, Features="Low ESL", LastUpdated="9/2/2020 1:02:23 AM", Lifecycle Status=Active, Minimum Order=1, Mounting Type="Surface Mount, MLCC", Package / Case="0402 (1005 Metric)", Packaging=TapeAndReel, Part Number=C1005X5R1A225K050BC, Part Status=Active, PartId=2144, Price=0.07, Series=C, Size / Dimension="0.039\" L x 0.020\" W (1.00mm x 0.50mm)", Supplier 1=DigiKey, Thickness (Max)="0.022\" (0.55mm)"
C23 C24 C25 C30 C31 C51: library part CL21A106KPCLQNC, "CAP CER 10UF 10V X5R 0805", Device Package="0805 (2012 Metric)", Manufacturer="Samsung Electro-Mechanics", Operating Temperature="-55°C ~ 85°C", Supplier Part Number 1=1276-2402-1-ND, Temperature Coefficient=X5R, Tolerance=±10%, Voltage - Rated=10V, Applications="General Purpose", Capacitance=10µF, ComponentLink1Description=Datasheet, ComponentLink1URL=http://www.samsungsem.com/kr/support/product-search/mlcc/CL21A106KPCLQNC.jsp, ComponentLink2Description="DigiKey Link", ComponentLink2URL=http://digikey.com/product-detail/en/samsung-electro-mechanics/CL21A106KPCLQNC/1276-2402-1-ND/3890488, LastUpdated="9/2/2020 1:04:19 AM", Lifecycle Status=Active, Minimum Order=1, Mounting Type="Surface Mount, MLCC", Package / Case="0805 (2012 Metric)", Packaging=TapeAndReel, Part Number=CL21A106KPCLQNC, Part Status=Active, PartId=14319, Price=0.03, Series=CL, Size / Dimension="0.079\" L x 0.049\" W (2.00mm x 1.25mm)", Supplier 1=DigiKey, Thickness (Max)="0.037\" (0.95mm)"
C26: library part C0402C103K4RECAUTO, "CAP CER 0402 10NF 16V X7R 10%", Capacitance=10000pF, Device Package="0402 (1005 Metric)", Manufacturer=KEMET, Operating Temperature="-55°C ~ 125°C", Ratings=AEC-Q200, Supplier Part Number 1=399-17876-1-ND, Temperature Coefficient=X7R, Tolerance=±10%, Voltage - Rated=16V, Applications="Automotive, ESD Protection", ComponentLink1Description=Datasheet, ComponentLink1URL=https://api.kemet.com/component-edge/download/datasheet/C0402C103K4RECAUTO.pdf, ComponentLink2Description="DigiKey Link", ComponentLink2URL=http://digikey.com/product-detail/en/kemet/C0402C103K4RECAUTO/399-17876-1-ND/8640543, LastUpdated="9/2/2020 1:02:25 AM", Lifecycle Status=Active, Minimum Order=1, Mounting Type="Surface Mount, MLCC", Package / Case="0402 (1005 Metric)", Packaging=TapeAndReel, Part Number=C0402C103K4RECAUTO, Part Status=Active, PartId=1725, Price=0.02, Series="ESD SMD Auto X7R", Size / Dimension="0.039\" L x 0.020\" W (1.00mm x 0.50mm)", Supplier 1=DigiKey, Thickness (Max)="0.022\" (0.55mm)"
C41: library part 0402N220F500CT, "CAP CER 22PF 50V C0G/NP0 0402", Device Package="0402 (1005 Metric)", Manufacturer="Walsin Technology Corporation", Operating Temperature="-55°C ~ 125°C", Supplier Part Number 1=1292-1280-1-ND, Temperature Coefficient="C0G, NP0", Tolerance=±1%, Voltage - Rated=50V, Applications="General Purpose", Capacitance=22pF, ComponentLink1Description=Datasheet, ComponentLink1URL=http://www.passivecomponent.com/wp-content/uploads/2018/10/MLCC.pdf, ComponentLink2Description="DigiKey Link", ComponentLink2URL=http://digikey.com/product-detail/en/walsin-technology-corporation/0402N220F500CT/1292-1280-1-ND/9355284, LastUpdated="9/2/2020 1:02:14 AM", Lifecycle Status=Active, Minimum Order=1, Mounting Type="Surface Mount, MLCC", Package / Case="0402 (1005 Metric)", Packaging=TapeAndReel, Part Number=0402N220F500CT, Part Status=Active, PartId=6200, Price=0.01, Series=-, Size / Dimension="0.039\" L x 0.020\" W (1.00mm x 0.50mm)", Supplier 1=DigiKey, Thickness (Max)="0.022\" (0.55mm)"
C46 C47 C49: library part GJM1555C1H200FB01D, "CAP CER 20PF 50V C0G/NP0 0402", Device Package="0402 (1005 Metric)", Manufacturer="Murata Electronics", Operating Temperature="-55°C ~ 125°C", Supplier Part Number 1=490-11204-1-ND, Temperature Coefficient="C0G, NP0", Tolerance=±1%, Voltage - Rated=50V, Applications="RF, Microwave, High Frequency", Capacitance=20pF, ComponentLink1Description=Datasheet, ComponentLink1URL=https://search.murata.co.jp/Ceramy/image/img/A01X/G101/ENG/GJM1555C1H200FB01-01.pdf, ComponentLink2Description="DigiKey Link", ComponentLink2URL=http://digikey.com/product-detail/en/murata-electronics/GJM1555C1H200FB01D/490-11204-1-ND/5333044, Features="High Q, Low Loss", LastUpdated="9/2/2020 1:02:17 AM", Lifecycle Status=Active, Minimum Order=1, Mounting Type="Surface Mount, MLCC", Package / Case="0402 (1005 Metric)", Packaging=TapeAndReel, Part Number=GJM1555C1H200FB01D, Part Status=Active, PartId=4905, Price=0.04, Series=GJM, Size / Dimension="0.039\" L x 0.020\" W (1.00mm x 0.50mm)", Supplier 1=DigiKey, Thickness (Max)="0.022\" (0.55mm)"
C48: library part 0402ZD105KAT2A, "CAP CER 1UF 10V X5R 0402", Device Package="0402 (1005 Metric)", Manufacturer="AVX Corporation", Operating Temperature="-55°C ~ 85°C", Supplier Part Number 1=478-4596-1-ND, Temperature Coefficient=X5R, Tolerance=±10%, Voltage - Rated=10V, Applications="General Purpose", Capacitance=1µF, ComponentLink1Description=Datasheet, ComponentLink1URL=http://datasheets.avx.com/cx5r.pdf, ComponentLink2Description="DigiKey Link", ComponentLink2URL=http://digikey.com/product-detail/en/avx-corporation/0402ZD105KAT2A/478-4596-1-ND/1645907, LastUpdated="9/2/2020 1:02:11 AM", Lifecycle Status=Active, Minimum Order=1, Mounting Type="Surface Mount, MLCC", Package / Case="0402 (1005 Metric)", Packaging=TapeAndReel, Part Number=0402ZD105KAT2A, Part Status=Active, PartId=7596, Price=0.03, Series=-, Size / Dimension="0.039\" L x 0.020\" W (1.00mm x 0.50mm)", Supplier 1=DigiKey, Thickness (Max)="0.022\" (0.56mm)"
C50: library part LMK325ABJ107MMHP, "CAP CER 100UF 10V X5R 1210", Device Package="1210 (3225 Metric)", Manufacturer="Taiyo Yuden", Operating Temperature="-55°C ~ 85°C", Supplier Part Number 1=587-5467-1-ND, Temperature Coefficient=X5R, Tolerance=±20%, Voltage - Rated=10V, Applications=Automotive, Capacitance=100µF, ComponentLink1Description=Datasheet, ComponentLink1URL="https://ds.yuden.co.jp/TYCOMPAS/ut/detail?pn=LMK325ABJ107MMHP &u=M", ComponentLink2Description="DigiKey Link", ComponentLink2URL=http://digikey.com/product-detail/en/taiyo-yuden/LMK325ABJ107MMHP/587-5467-1-ND/7067143, LastUpdated="9/2/2020 1:10:52 AM", Lifecycle Status=Active, Minimum Order=1, Mounting Type="Surface Mount, MLCC", Package / Case="1210 (3225 Metric)", Packaging=TapeAndReel, Part Number=LMK325ABJ107MMHP, Part Status=Active, PartId=23688, Price=0.49, Series=M, Size / Dimension="0.126\" L x 0.098\" W (3.20mm x 2.50mm)", Supplier 1=DigiKey, Thickness (Max)="0.110\" (2.80mm)"
FB1 FB2: library part MPZ1608S181ATAH0, "FERRITE BEAD 180 OHM 0603 1LN", Current Rating (Max)=2A, DC Resistance (DCR) (Max)=50mOhm, Device Package="0603 (1608 Metric)", Impedance @ Frequency="180 Ohms @ 100MHz", Manufacturer="TDK Corporation", Operating Temperature="-55°C ~ 125°C", Supplier Part Number 1=445-5220-1-ND, ComponentLink1Description=Datasheet, ComponentLink1URL=https://product.tdk.com/info/en/catalog/datasheets/beads_commercial_power_mpz1608_en.pdf?ref_disty=digikey, ComponentLink2Description="DigiKey Link", ComponentLink2URL=http://digikey.com/product-detail/en/tdk-corporation/MPZ1608S181ATAH0/445-5220-1-ND/2117954, Filter Type="Power Line", Height (Max)="0.030\" (0.75mm)", LastUpdated="9/2/2020 1:18:17 AM", Lifecycle Status=Active, Minimum Order=1, Mounting Type="Surface Mount", Number of Lines=1, Package / Case="0603 (1608 Metric)", Packaging=TapeAndReel, Part Number=MPZ1608S181ATAH0, Part Status=Active, PartId=1025, Price=0.02, Series=MPZ, Size / Dimension="0.063\" L x 0.032\" W (1.60mm x 0.80mm)", Supplier 1=DigiKey
J1 J3: "CONN RCPT USB2.0 TYPEA 4POS R/A", Current Rating (Amps)=2.5A, Manufacturer="Amphenol ICC (FCI)", Operating Temperature="-55°C ~ 85°C", Supplier Part Number 1=609-1041-ND, ComponentLink1Description=Datasheet, ComponentLink1URL=http://www.amphenol-icc.com/media/wysiwyg/files/drawing/73725.pdf, ComponentLink2Description="DigiKey Link", ComponentLink2URL=http://digikey.com/product-detail/en/amphenol-icc-fci/73725-0110BLF/609-1041-ND/1001355, Connector Type="USB - A", Features="Board Lock", Gender=Receptacle, LastUpdated="4/30/2020 11:56:05 AM", Lifecycle Status=Active, Mating Cycles=1500, Minimum Order=1, Mounting Feature=Vertical, Mounting Type="Through Hole, Right Angle", Number of Contacts=4, Number of Ports=1, Packaging=Tube, Part Number=73725-0110BLF, Part Status=Active, Price=0.91, Series=73725, Shielding=Shielded, Specifications="USB 2.0", Supplier 1=DigiKey, Termination=Solder
J2: "CONN RCPT MINI USB B 5POS SMD RA", Current Rating (Amps)="1A per Contact", Manufacturer="Amphenol ICC (FCI)", Operating Temperature="-25°C ~ 85°C", Supplier Part Number 1=609-4700-2-ND, Voltage - Rated=30V, ComponentLink1Description=Datasheet, ComponentLink1URL=http://www.amphenol-icc.com/media/wysiwyg/files/drawing/10033526.pdf, ComponentLink2Description="DigiKey Link", ComponentLink2URL=//digikey.com/product-detail/en/amphenol-icc-fci/10033526-N3212LF/609-4700-2-ND/4292074, Connector Type="USB - mini B", Features="Board Guide, Solder Retention", Gender=Receptacle, LastUpdated="12/9/2019 8:52:14 PM", Lifecycle Status=0, Mating Cycles=5000, Minimum Order=1, Mounting Feature=Horizontal, Mounting Type="Surface Mount, Right Angle", Number of Contacts=5, Number of Ports=1, Packaging=TapeAndReel, Part Number=10033526-N3212LF, Part Status=Active, Price=0.39, Series=-, Shielding=Shielded, Supplier 1=DigiKey, Termination=Solder
J4: "CONN MICRO SD CARD PUSH-PUSH R/A", Manufacturer="Hirose Electric Co Ltd", Supplier Part Number 1=HR1942TR-ND, Card Type="Secure Digital - microSD™", ComponentLink1Description=Datasheet, ComponentLink1URL=https://www.hirose.com/product/download/?distributor=digikey&type=specSheet&lang=en&num=DM3BT-DSF-PEJS, ComponentLink2Description="DigiKey Link", ComponentLink2URL=//digikey.com/product-detail/en/hirose-electric-co-ltd/DM3BT-DSF-PEJS/HR1942TR-ND/1982749, Connector Type="Connector and Ejector", Contact Finish=Gold, Features=Switch, Height Above Board="0.072\" (1.83mm)", Insertion, Removal Method="Push In, Push Out", LastUpdated="12/16/2019 8:35:34 PM", Lifecycle Status=0, Minimum Order=1, Mounting Feature="Reverse - Bottom", Mounting Type="Surface Mount, Right Angle", Number of Positions="10 (8 + 2)", Packaging=TapeAndReel, Part Number=DM3BT-DSF-PEJS, Part Status=Active, Price=1.25, Series=DM3, Supplier 1=DigiKey
J5: "0.5mm Pitch Low-Profile (H=1.5mm) Board to Board / FPC to Board Connectors", Current Rating=300mA, Flammability Rating="UL94 V-0", Housing Color=Black, Insulation Resistance=500MR, Manufacturer=Hirose, Max Operating Temperature=85°C, Min Operating Temperature=-35°C, Package Quantity=2000, Supplier Part Number 1=H124750CT-ND, Voltage Rating=50V, Category="Headers and Wire Housings", ComponentLink1Description=https://datasheet.ciiva.com/11751/0900766b80f5fb65-11751775.pdf?src-supplier=RSComponents, ComponentLink1URL=https://datasheet.ciiva.com/11751/0900766b80f5fb65-11751775.pdf?src-supplier=RSComponents, ComponentLink2Description=https://datasheet.ciiva.com/397/e68801060-397924.pdf?src-supplier=Digi-Key, ComponentLink2URL=https://datasheet.ciiva.com/397/e68801060-397924.pdf?src-supplier=Digi-Key, ComponentLink3Description=https://datasheet.ciiva.com/13568/e68801060-16897-13568044.pdf?src-supplier=Mouser, ComponentLink3URL=https://datasheet.ciiva.com/13568/e68801060-16897-13568044.pdf?src-supplier=Mouser, ComponentLink4Description=https://datasheet.ciiva.com/8038/e68801060-8038886.pdf?src-supplier=Element14, ComponentLink4URL=https://datasheet.ciiva.com/8038/e68801060-8038886.pdf?src-supplier=Element14, Connector Type=Plug,PCB, Contact Gender=Male, Contact Material="Bronze,Copper Alloy", Contact Plating=Gold, Gender=Male, Housing Material=Polymer, Lead Free="Lead Free", Manufacturer Part Number=DF23C-40DP-0.5V(92), Mated Stacking Heights=1.5mm, Mount="Surface Mount", Number of Contacts=40, Number of Positions=40, Number of Rows=2, Orientation=Straight, Packaging="Tape and Reel", Pitch=0.5mm, Pricing 1="1=1.25000, 10=1.09700, 25=1.03200, 50=0.98900, 100=0.94600, 250=0.86000, 500=0.77400, 1000=0.68800 (USD)", REACH SVHC="No SVHC", RoHS=Yes, RoHS Compliant=Yes, Row Spacing=4.3mm, Series=DF23, Stock 1=419, Supplier 1=Digi-Key, Termination=SMD/SMT
J6: "Header, 4-Pin", LatestRevisionDate=17-Jul-2002, LatestRevisionNote="Re-released for DXP Platform.", Publisher="Altium Limited"
J7: library part CMP-2000-05353-1, "Male Header, Pitch 1.27 mm, 2 x 5 Position, Height 6.25 mm", Color=Black, Manufacturer=Samtec, Package Description="Male Header, Pitch 1.27 mm, 2 x 5 Position, Height 5.97 mm, Tail Length 4.32 mm", Standard Package=1, Category=Connectors,Interconnects, Connector Type=Header,Unshrouded, Contact Finish=Gold, Contact Finish Thickness=10µin(0.25µm), Contact Mating Length="0.120\"(3.05mm)", Contact Type=MalePin, Datasheet URL=http://suddendocs.samtec.com/prints/ftsh-1xx-xx-xxx-dv-xxx-mkt.pdf, Datasheet Version="Rev. ET, 10/1995", Family=RectangularConnectors-Headers,MalePins, Manufacturer URL=http://www.samtec.com/, Mating Products="SFMC-105-L2-S-D-TR-ND / -CONN.05\"SURFACE10POSSMT / FLE-105-01-G-DV-TR-ND / -CONNSKT1.27MM10POSDUALSMD / FLE-105-01-G-DV-A-P-ND / -CONNSKT1.27MM10POSDUALSMD / FLE-105-01-G-DV-A-ND / -CONNSKT1.27MM10POSDUALSMD / CLP-105-02-G-D-P-TR-ND / -CONNRCPT10POSDUAL.05\"SMD / SAM1155-05-ND / -CONNRCPT10POSDUAL.05\"SMD / SAM1154-05-ND / -CONNRCPT10POSDUAL.05\"SMD / SAM1153-05-ND / -CONNRCPT10POSDUAL.05\"SMD / SAM1226-05-ND / -CONNRCPT.05\"10POSDUALSMD", Mounting Type=SurfaceMount, Number of Positions=10, Number of Positions Loaded=All, Number of Rows=2, Other Names=Q3937619, Package Reference=FTSH-105-01-L-DV-K, Package URL=http://suddendocs.samtec.com/prints/ftsh-1xx-xx-xxx-dv-xxx-footprint.pdf, Packaging=Tube, Pitch="0.050\"(1.27mm)", Product Training Modules=Board-to-BoardConnectors, Row Spacing="0.050\"(1.27mm)", Series=FTSH, Termination=Solder
L1: library part CIGT201610EH2R2MNE, "FIXED IND 2.2UH 2.5A 87MOHM SMD", Current - Saturation=2.9A, Current Rating (Amps)=2.5A, DC Resistance (DCR)="87mOhm Max", Device Package="0806 (2016 Metric)", Inductance Frequency - Test=1MHz, Manufacturer="Samsung Electro-Mechanics", Operating Temperature="-40°C ~ 125°C", Supplier Part Number 1=1276-6901-1-ND, Tolerance=±20%, ComponentLink1Description=Datasheet, ComponentLink1URL=http://www.samsungsem.com/kr/support/product-search/inductor/CIGT201610EH2R2MNE.jsp, ComponentLink2Description="DigiKey Link", ComponentLink2URL=http://digikey.com/product-detail/en/samsung-electro-mechanics/CIGT201610EH2R2MNE/1276-6901-1-ND/7041301, Height - Seated (Max)="0.039\" (1.00mm)", Inductance=2.2µH, LastUpdated="9/2/2020 1:24:36 AM", Lifecycle Status=Active, Material - Core="Metal Composite", Minimum Order=1, Mounting Type="Surface Mount", Package / Case="0806 (2016 Metric)", Packaging=TapeAndReel, Part Number=CIGT201610EH2R2MNE, Part Status=Active, PartId=3766, Price=0.11, Series=CIGT, Shielding=Unshielded, Size / Dimension="0.079\" L x 0.063\" W (2.00mm x 1.60mm)", Supplier 1=DigiKey, Supplier Device Package="0806 (2016 Metric)", Type="Thin Film"
R1 R2 R11 R19 R22 R23 R24 R25 R26 R27 R28 R29 R30: library part CRCW0402100KFKEDC, "RES SMD 100K OHM 1% 1/16W 0402", Device Package="0402 (1005 Metric)", Manufacturer="Vishay Dale", Operating Temperature="-55°C ~ 155°C", Power (Watts)="0.063W, 1/16W", Resistance="100 kOhms", Supplier Device Package=0402, Supplier Part Number 1=541-3960-1-ND, Temperature Coefficient=±100ppm/°C, Tolerance=±1%, ComponentLink1Description=Datasheet, ComponentLink1URL=http://www.vishay.com/docs/28773/crcwce3.pdf, ComponentLink2Description="DigiKey Link", ComponentLink2URL=http://digikey.com/product-detail/en/vishay-dale/CRCW0402100KFKEDC/541-3960-1-ND/7928643, Composition="Thick Film", Height - Seated (Max)="0.014\" (0.35mm)", LastUpdated="9/2/2020 1:07:49 AM", Lifecycle Status=Active, Minimum Order=1, Number of Terminations=2, Package / Case="0402 (1005 Metric)", Packaging=CutTape, Part Number=CRCW0402100KFKEDC, Part Status=Active, PartId=12665, Price=0.10, Series=CRCW-C, Size / Dimension="0.039\" L x 0.020\" W (1.00mm x 0.50mm)", Supplier 1=DigiKey
R3 R32: library part CR0402-FX-2202GLF, "RES SMD 22K OHM 1% 1/16W 0402", Device Package="0402 (1005 Metric)", Manufacturer="Bourns Inc.", Operating Temperature="-55°C ~ 155°C", Power (Watts)="0.063W, 1/16W", Resistance="22 kOhms", Supplier Device Package=0402, Supplier Part Number 1=CR0402-FX-2202GLFCT-ND, Temperature Coefficient=±100ppm/°C, Tolerance=±1%, ComponentLink1Description=Datasheet, ComponentLink1URL=https://www.bourns.com/docs/Product-Datasheets/CR0402.pdf, ComponentLink2Description="DigiKey Link", ComponentLink2URL=http://digikey.com/product-detail/en/bourns-inc/CR0402-FX-2202GLF/CR0402-FX-2202GLFCT-ND/4247665, Composition="Thick Film", Height - Seated (Max)="0.016\" (0.40mm)", LastUpdated="9/2/2020 1:08:01 AM", Lifecycle Status=Active, Minimum Order=1, Number of Terminations=2, Package / Case="0402 (1005 Metric)", Packaging=CutTape, Part Number=CR0402-FX-2202GLF, Part Status=Active, PartId=6638, Price=0.10, Series=CR0402, Size / Dimension="0.039\" L x 0.020\" W (1.00mm x 0.50mm)", Supplier 1=DigiKey
R4: library part CR0402-FX-2002GLF, "RES SMD 20K OHM 1% 1/16W 0402", Device Package="0402 (1005 Metric)", Manufacturer="Bourns Inc.", Operating Temperature="-55°C ~ 155°C", Power (Watts)="0.063W, 1/16W", Resistance="20 kOhms", Supplier Device Package=0402, Supplier Part Number 1=CR0402-FX-2002GLFCT-ND, Temperature Coefficient=±100ppm/°C, Tolerance=±1%, ComponentLink1Description=Datasheet, ComponentLink1URL=https://www.bourns.com/docs/Product-Datasheets/CR0402.pdf, ComponentLink2Description="DigiKey Link", ComponentLink2URL=http://digikey.com/product-detail/en/bourns-inc/CR0402-FX-2002GLF/CR0402-FX-2002GLFCT-ND/3740845, Composition="Thick Film", Height - Seated (Max)="0.016\" (0.40mm)", LastUpdated="9/2/2020 1:08:01 AM", Lifecycle Status=Active, Minimum Order=1, Number of Terminations=2, Package / Case="0402 (1005 Metric)", Packaging=CutTape, Part Number=CR0402-FX-2002GLF, Part Status=Active, PartId=6612, Price=0.10, Series=CR0402, Size / Dimension="0.039\" L x 0.020\" W (1.00mm x 0.50mm)", Supplier 1=DigiKey
R5 R6: library part CR0402-FX-4701GLF, "RES SMD 4.7K OHM 1% 1/16W 0402", Device Package="0402 (1005 Metric)", Manufacturer="Bourns Inc.", Operating Temperature="-55°C ~ 155°C", Power (Watts)="0.063W, 1/16W", Resistance="4.7 kOhms", Supplier Device Package=0402, Supplier Part Number 1=CR0402-FX-4701GLFCT-ND, Temperature Coefficient=±100ppm/°C, Tolerance=±1%, ComponentLink1Description=Datasheet, ComponentLink1URL=https://www.bourns.com/docs/Product-Datasheets/CR0402.pdf, ComponentLink2Description="DigiKey Link", ComponentLink2URL=http://digikey.com/product-detail/en/bourns-inc/CR0402-FX-4701GLF/CR0402-FX-4701GLFCT-ND/3740849, Composition="Thick Film", Height - Seated (Max)="0.016\" (0.40mm)", LastUpdated="9/2/2020 1:08:01 AM", Lifecycle Status=Active, Minimum Order=1, Number of Terminations=2, Package / Case="0402 (1005 Metric)", Packaging=CutTape, Part Number=CR0402-FX-4701GLF, Part Status=Active, PartId=6504, Price=0.10, Series=CR0402, Size / Dimension="0.039\" L x 0.020\" W (1.00mm x 0.50mm)", Supplier 1=DigiKey
R8 R14 R15 R16: library part AC0402FR-0751RL, "RES SMD 51 OHM 1% 1/16W 0402", Device Package="0402 (1005 Metric)", Manufacturer=Yageo, Operating Temperature="-55°C ~ 155°C", Power (Watts)="0.063W, 1/16W", Ratings=AEC-Q200, Resistance="51 Ohms", Supplier Device Package=0402, Supplier Part Number 1=YAG3500CT-ND, Temperature Coefficient=±100ppm/°C, Tolerance=±1%, ComponentLink1Description=Datasheet, ComponentLink1URL=https://www.yageo.com/upload/media/product/productsearch/datasheet/rchip/PYu-AC_51_RoHS_L_7.pdf, ComponentLink2Description="DigiKey Link", ComponentLink2URL=http://digikey.com/product-detail/en/yageo/AC0402FR-0751RL/YAG3500CT-ND/6006349, Composition="Thick Film", Features="Automotive AEC-Q200, Moisture Resistant", Height - Seated (Max)="0.015\" (0.37mm)", LastUpdated="9/2/2020 1:07:50 AM", Lifecycle Status=Active, Minimum Order=1, Number of Terminations=2, Package / Case="0402 (1005 Metric)", Packaging=CutTape, Part Number=AC0402FR-0751RL, Part Status=Active, PartId=12070, Price=0.10, Series=AC, Size / Dimension="0.039\" L x 0.020\" W (1.00mm x 0.50mm)", Supplier 1=DigiKey
R9 R13 R33: library part CRG0402ZR, "RES SMD 0 OHM JUMPER 1/16W 0402", Device Package="0402 (1005 Metric)", Manufacturer="TE Connectivity Passive Product", Operating Temperature="-55°C ~ 155°C", Power (Watts)="0.063W, 1/16W", Supplier Device Package=0402, Supplier Part Number 1=A106025CT-ND, Tolerance=Jumper, ComponentLink1Description=Datasheet, ComponentLink1URL=https://www.te.com/commerce/DocumentDelivery/DDEController?Action=srchrtrv&DocNm=1773204&DocType=DS&DocLang=English, ComponentLink2Description="DigiKey Link", ComponentLink2URL=http://digikey.com/product-detail/en/te-connectivity-passive-product/CRG0402ZR/A106025CT-ND/3477649, Composition="Thick Film", Height - Seated (Max)="0.016\" (0.40mm)", LastUpdated="9/2/2020 1:07:28 AM", Lifecycle Status=Active, Minimum Order=1, Number of Terminations=2, Package / Case="0402 (1005 Metric)", Packaging=CutTape, Part Number=CRG0402ZR, Part Status=Active, PartId=20614, Price=0.10, Series="CRG, Neohm", Size / Dimension="0.039\" L x 0.020\" W (1.00mm x 0.50mm)", Supplier 1=DigiKey
R10: library part RCS04021M00JNED, "RES SMD 1M OHM 5% 1/5W 0402", Device Package="0402 (1005 Metric)", Manufacturer="Vishay Dale", Operating Temperature="-55°C ~ 155°C", Power (Watts)="0.2W, 1/5W", Ratings=AEC-Q200, Resistance="1 MOhms", Supplier Device Package=0402, Supplier Part Number 1=541-2922-1-ND, Temperature Coefficient=±200ppm/°C, Tolerance=±5%, ComponentLink1Description=Datasheet, ComponentLink1URL=http://www.vishay.com/docs/20065/rcse3.pdf, ComponentLink2Description="DigiKey Link", ComponentLink2URL=http://digikey.com/product-detail/en/vishay-dale/RCS04021M00JNED/541-2922-1-ND/5867215, Composition="Thick Film", Features="Automotive AEC-Q200, Pulse Withstanding", Height - Seated (Max)="0.016\" (0.40mm)", LastUpdated="9/2/2020 1:08:03 AM", Lifecycle Status=Active, Minimum Order=1, Number of Terminations=2, Package / Case="0402 (1005 Metric)", Packaging=TapeAndReel, Part Number=RCS04021M00JNED, Part Status=Active, PartId=5540, Price=0.01, Series="RCS e3", Size / Dimension="0.039\" L x 0.020\" W (1.00mm x 0.50mm)", Supplier 1=DigiKey
R12: library part AC0402FR-075K62L, "RES SMD 5.62K OHM 1% 1/16W 0402", Device Package="0402 (1005 Metric)", Manufacturer=Yageo, Operating Temperature="-55°C ~ 155°C", Power (Watts)="0.063W, 1/16W", Ratings=AEC-Q200, Resistance="5.62 kOhms", Supplier Device Package=0402, Supplier Part Number 1=YAG5303CT-ND, Temperature Coefficient=±100ppm/°C, Tolerance=±1%, ComponentLink1Description=Datasheet, ComponentLink1URL=https://www.yageo.com/upload/media/product/productsearch/datasheet/rchip/PYu-AC_51_RoHS_L_7.pdf, ComponentLink2Description="DigiKey Link", ComponentLink2URL=http://digikey.com/product-detail/en/yageo/AC0402FR-075K62L/YAG5303CT-ND/7063646, Composition="Thick Film", Features="Automotive AEC-Q200, Moisture Resistant", Height - Seated (Max)="0.015\" (0.37mm)", LastUpdated="9/2/2020 1:08:04 AM", Lifecycle Status=Active, Minimum Order=1, Number of Terminations=2, Package / Case="0402 (1005 Metric)", Packaging=CutTape, Part Number=AC0402FR-075K62L, Part Status=Active, PartId=5233, Price=0.10, Series=AC, Size / Dimension="0.039\" L x 0.020\" W (1.00mm x 0.50mm)", Supplier 1=DigiKey
R20 R21: library part RCS04022K20FKED, "RES SMD 2.2K OHM 1% 1/5W 0402", Part Number=RCS04022K20FKED
R31: library part ERJ-PA2F1502X, "RES SMD 15K OHM 1% 1/5W 0402", Device Package="0402 (1005 Metric)", Manufacturer="Panasonic Electronic Components", Operating Temperature="-55°C ~ 155°C", Power (Watts)="0.2W, 1/5W", Ratings=AEC-Q200, Resistance="15 kOhms", Supplier Device Package=0402, Supplier Part Number 1=P17231CT-ND, Temperature Coefficient=±100ppm/°C, Tolerance=±1%, ComponentLink1Description=Datasheet, ComponentLink1URL=https://industrial.panasonic.com/cdbs/www-data/pdf/RDO0000/AOA0000C331.pdf, ComponentLink2Description="DigiKey Link", ComponentLink2URL=http://digikey.com/product-detail/en/panasonic-electronic-components/ERJ-PA2F1502X/P17231CT-ND/5402719, Composition="Thick Film", Features="Automotive AEC-Q200, Pulse Withstanding", Height - Seated (Max)="0.016\" (0.40mm)", LastUpdated="9/2/2020 1:07:58 AM", Lifecycle Status=Active, Minimum Order=1, Number of Terminations=2, Package / Case="0402 (1005 Metric)", Packaging=TapeAndReel, Part Number=ERJ-PA2F1502X, Part Status=Active, PartId=7876, Price=0.02, Series=ERJ, Size / Dimension="0.039\" L x 0.020\" W (1.00mm x 0.50mm)", Supplier 1=DigiKey
U1: "ARM926 MPU, 1GBIT DDR2, BGA, IND TEMP", Manufacturer=Microchip, Manufacturer Part Number=SAM9X60D6K-I/4GB, Supplier Part Number 1=150-SAM9X60D6K-I/4GB-ND, Category=Microprocessors, Pricing 1="1=10.63000, 25=9.74040, 100=8.82060 (USD)", RoHS=No, Stock 1=237, Supplier 1=Digi-Key
U2: library part MIC2800-G8SYML-TR, "DC-DC + 2 Linear Regulators with LowQ Mode & POR 16 VQFN 3x3x0.90mm T/R RoHS Compliant: Yes", Manufacturer=Microchip, Supplier Part Number 1=MIC2800-G8SYML-TR-ND, Category="Power Management ICs", Manufacturer Part Number=MIC2800-G8SYML-TR, Pricing 1="5000=1.90500 (USD)", RoHS=Yes, Stock 1=5000, Supplier 1=Digi-Key